# EAGLE board memory-smd (EAGLE 5.11)
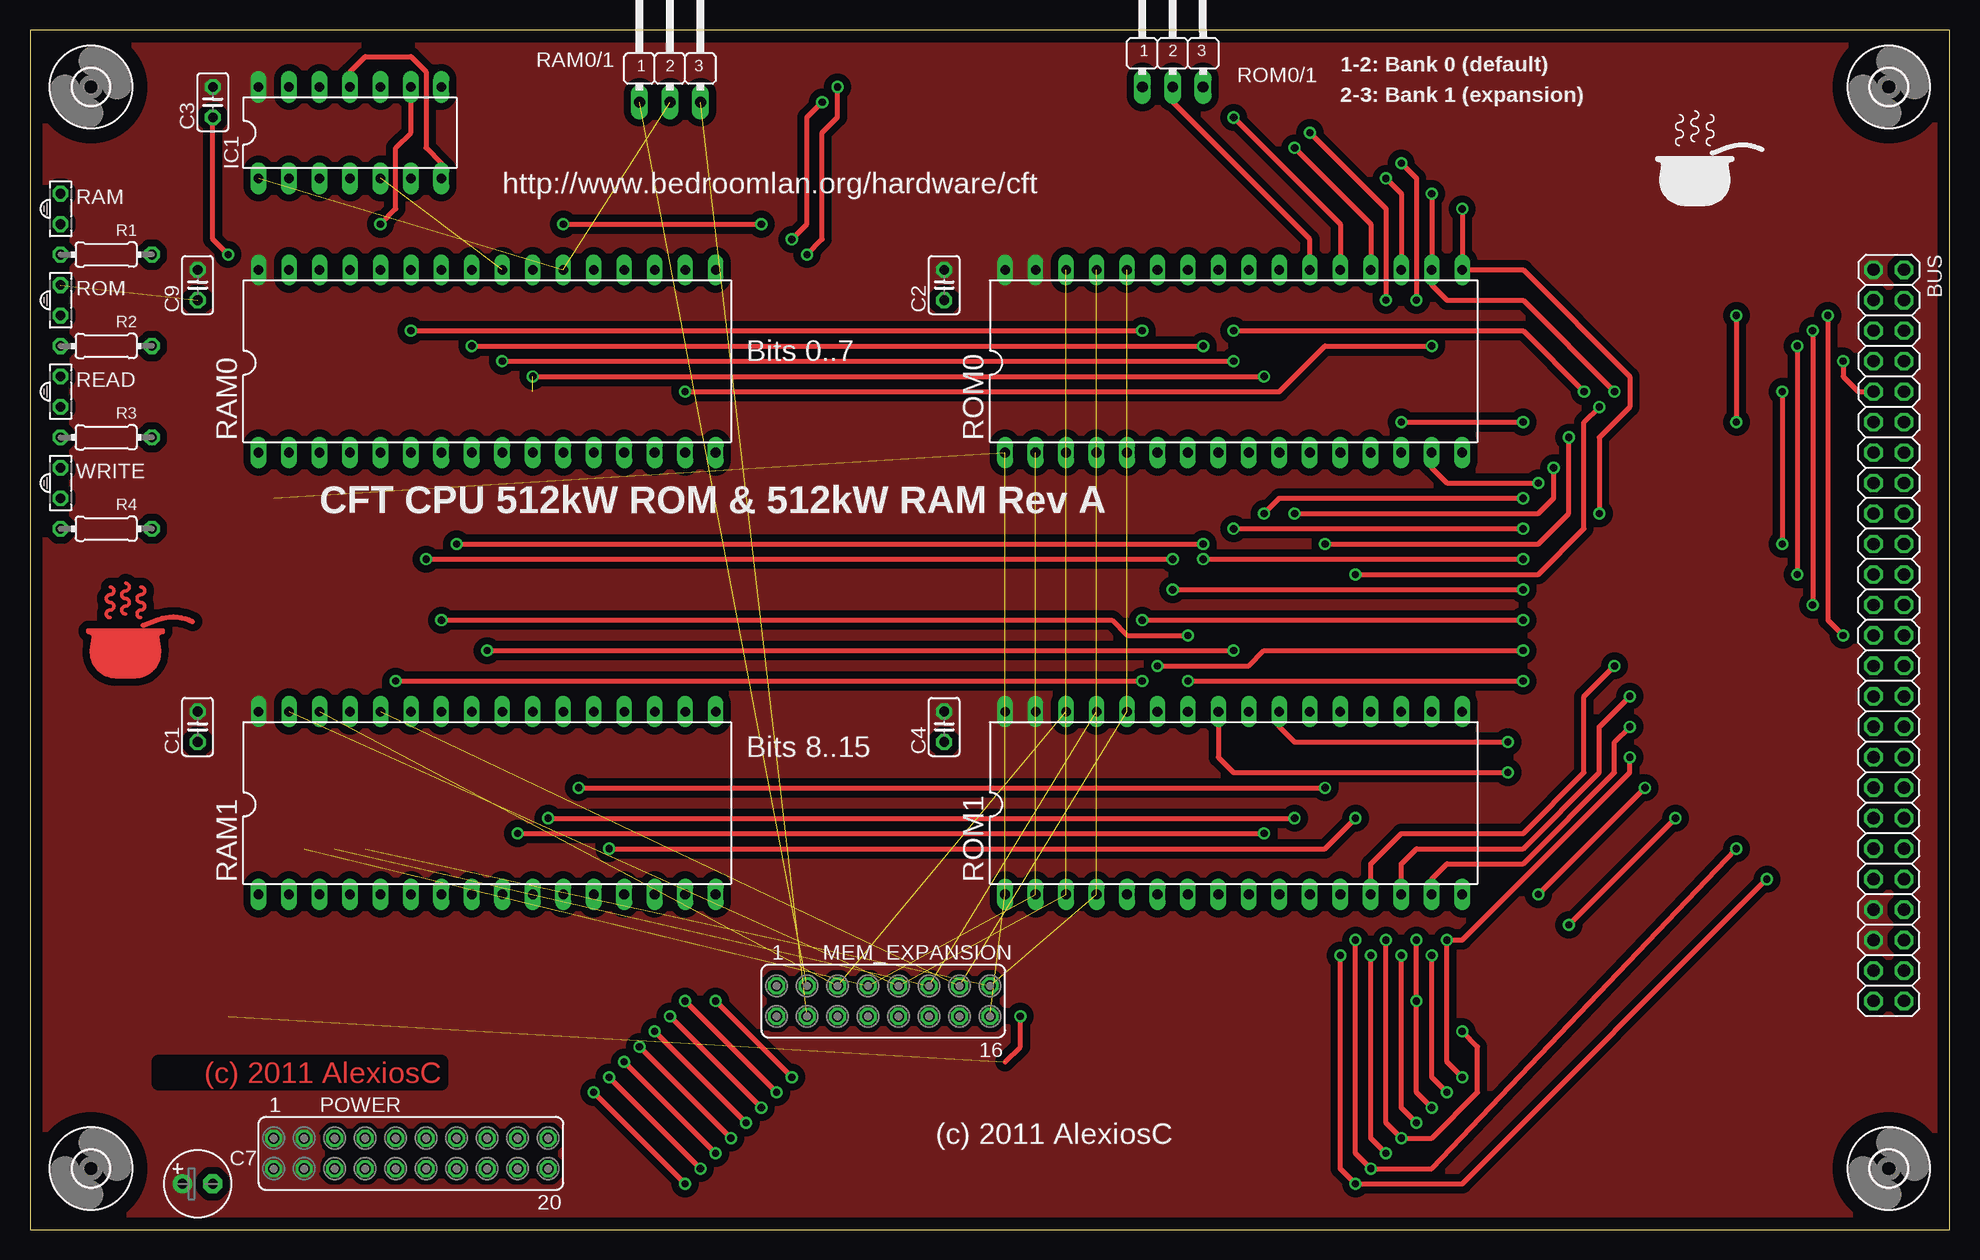
[diagram p0: board, top side]
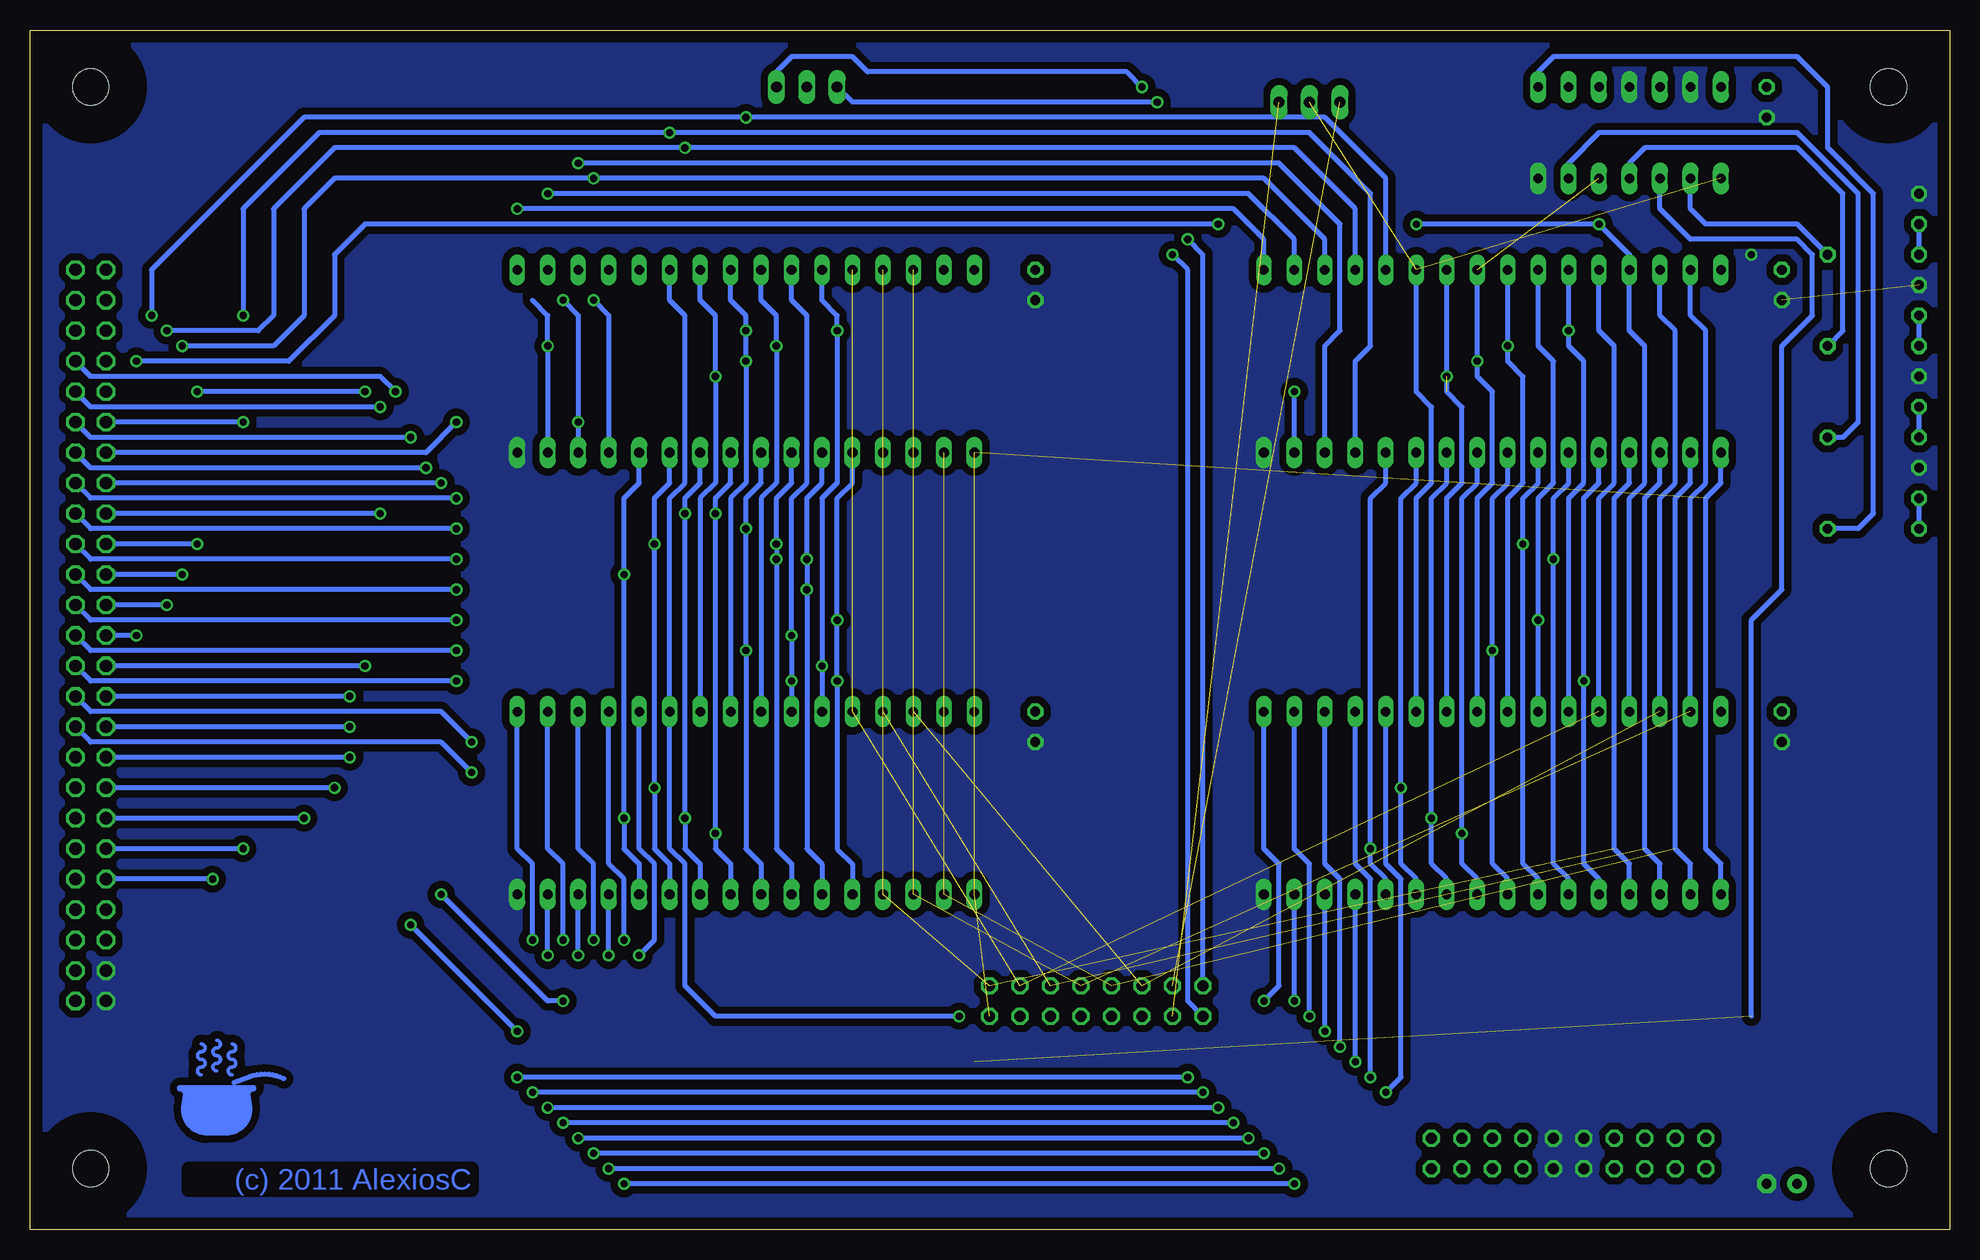
[diagram p1: board, bottom side, seen from below]

Size 160 x 100 mm. Coordinates in mm from the lower left corner, seen from the top.
Outline: 0,0 160,0 160,100 0,100 0,0
Copper layers (1*16): Top 0.035mm / dielectric 1.5mm / Bottom 0.035mm
Design rules "olimex-10mil": minimum track width 10mil, minimum drill 24mil, track to track 10mil, track to pad 10mil, pad to pad 10mil, via to via 10mil, smd to smd 10mil, copper to edge 40mil, drill to drill 10mil, minimum pad ring 10mil, minimum via ring 8mil, stop-mask expansion 0mil, vias tented up to drill 0mil, thermal gap 10mil
Net classes: 0 default: width 0.406 mm, clearance 0.305 mm; 1 Decoupling: width 1.27 mm

## Footprints (pad centres in the part's own frame; a part is rotated, then mirrored left to right if it is on the bottom)
2X25 = drill 1.016 octagon: 1 -30.48,-1.27; 2 -30.48,1.27; 3 -27.94,-1.27; 4 -27.94,1.27; 5 -25.4,-1.27; 6 -25.4,1.27; 7 -22.86,-1.27; 8 -22.86,1.27; 9 -20.32,-1.27; 10 -20.32,1.27; 11 -17.78,-1.27; 12 -17.78,1.27; 13 -15.24,-1.27; 14 -15.24,1.27; 15 -12.7,-1.27; 16 -12.7,1.27; 17 -10.16,-1.27; 18 -10.16,1.27; 19 -7.62,-1.27; 20 -7.62,1.27; 21 -5.08,-1.27; 22 -5.08,1.27; 23 -2.54,-1.27; 24 -2.54,1.27; 25 0,-1.27; 26 0,1.27; 27 2.54,-1.27; 28 2.54,1.27; 29 5.08,-1.27; 30 5.08,1.27; 31 7.62,-1.27; 32 7.62,1.27; 33 10.16,-1.27; 34 10.16,1.27; 35 12.7,-1.27; 36 12.7,1.27; 37 15.24,-1.27; 38 15.24,1.27; 39 17.78,-1.27; 40 17.78,1.27; 41 20.32,-1.27; 42 20.32,1.27; 43 22.86,-1.27; 44 22.86,1.27; 45 25.4,-1.27; 46 25.4,1.27; 47 27.94,-1.27; 48 27.94,1.27; 49 30.48,-1.27; 50 30.48,1.27
C025-025X050 = drill 0.813 octagon: 1 -1.27,0; 2 1.27,0
E2,5-6 = drill 0.813 pad 1.6 round: + -1.27,0 | drill 0.813 pad 1.6 octagon: - 1.27,0
3,0 = hole 3: 0,0
DIL14 = drill 0.813 long: 1 -7.62,-3.81; 2 -5.08,-3.81; 3 -2.54,-3.81; 4 0,-3.81; 5 2.54,-3.81; 6 5.08,-3.81; 7 7.62,-3.81; 8 7.62,3.81; 9 5.08,3.81; 10 2.54,3.81; 11 0,3.81; 12 -2.54,3.81; 13 -5.08,3.81; 14 -7.62,3.81
FE08-2 = drill 0.914 octagon: 1 -8.89,1.27; 2 -8.89,-1.27; 3 -6.35,1.27; 4 -6.35,-1.27; 5 -3.81,1.27; 6 -3.81,-1.27; 7 -1.27,1.27; 8 -1.27,-1.27; 9 1.27,1.27; 10 1.27,-1.27; 11 3.81,1.27; 12 3.81,-1.27; 13 6.35,1.27; 14 6.35,-1.27; 15 8.89,1.27; 16 8.89,-1.27
FE10-2 = drill 0.914 octagon: 1 -11.43,1.27; 2 -11.43,-1.27; 3 -8.89,1.27; 4 -8.89,-1.27; 5 -6.35,1.27; 6 -6.35,-1.27; 7 -3.81,1.27; 8 -3.81,-1.27; 9 -1.27,1.27; 10 -1.27,-1.27; 11 1.27,1.27; 12 1.27,-1.27; 13 3.81,1.27; 14 3.81,-1.27; 15 6.35,1.27; 16 6.35,-1.27; 17 8.89,1.27; 18 8.89,-1.27; 19 11.43,1.27; 20 11.43,-1.27
0204/7 = drill 0.813 octagon: 1 -3.81,0; 2 3.81,0
IRL80A = drill 0.813 octagon: A 0,-1.27; K 0,1.27
DIL32 = drill 0.813 long: 1 -19.05,-7.62; 2 -16.51,-7.62; 3 -13.97,-7.62; 4 -11.43,-7.62; 5 -8.89,-7.62; 6 -6.35,-7.62; 7 -3.81,-7.62; 8 -1.27,-7.62; 9 1.27,-7.62; 10 3.81,-7.62; 11 6.35,-7.62; 12 8.89,-7.62; 13 11.43,-7.62; 14 13.97,-7.62; 15 16.51,-7.62; 16 19.05,-7.62 | drill 0.8 long: 17 19.05,7.62; 18 16.51,7.62; 19 13.97,7.62; 20 11.43,7.62; 21 8.89,7.62; 22 6.35,7.62; 23 3.81,7.62; 24 1.27,7.62; 25 -1.27,7.62; 26 -3.81,7.62; 27 -6.35,7.62; 28 -8.89,7.62; 29 -11.43,7.62; 30 -13.97,7.62; 31 -16.51,7.62; 32 -19.05,7.62
JP2W = drill 0.914 long: 1 -2.54,-1.27; 2 0,-1.27; 3 2.54,-1.27

## Placement (x,y rotation side)
BUS  [2X25]  154.94,49.53 270 top
C1  1uF  [C025-025X050]  13.97,41.91 90 top
C2  1uF  [C025-025X050]  76.2,78.74 90 top
C3  0.1uF  [C025-025X050]  15.24,93.98 90 top
C4  1uF  [C025-025X050]  76.2,41.91 90 top
C7  100uF  [E2,5-6]  13.97,3.81 0 top
C9  1uF  [C025-025X050]  13.97,78.74 90 top
H1  MOUNT-HOLE3.0  [3,0]  154.94,95.25 0 top
H2  MOUNT-HOLE3.0  [3,0]  154.94,5.08 0 top
H3  MOUNT-HOLE3.0  [3,0]  5.08,5.08 0 top
H4  MOUNT-HOLE3.0  [3,0]  5.08,95.25 0 top
IC1  74HCT04N  [DIL14]  26.67,91.44 0 top
MEM_EXPANSION  [FE08-2]  71.12,19.05 0 top
POWER  [FE10-2]  31.75,6.35 0 top
R1  330  [0204/7]  6.35,81.28 180 top
R2  330  [0204/7]  6.35,73.66 180 top
R3  330  [0204/7]  6.35,66.04 180 top
R4  330  [0204/7]  6.35,58.42 180 top
RAM  [IRL80A]  2.54,85.09 0 top
RAM0  AS6C4008  [DIL32]  38.1,72.39 0 top
RAM0/1  [JP2W]  53.34,95.25 0 top
RAM1  AS6C4008  [DIL32]  38.1,35.56 0 top
READ  [IRL80A]  2.54,69.85 0 top
ROM  [IRL80A]  2.54,77.47 0 top
ROM0  29F040DIP32  [DIL32]  100.33,72.39 0 top
ROM0/1  [JP2W]  95.25,96.52 0 top
ROM1  29F040DIP32  [DIL32]  100.33,35.56 0 top
U$1  SIGNATUREPLANE  [SIGNATURE_PLANE]  5.08,45.72 0 top
U$2  SIGNATUREPLANE  [SIGNATURE_PLANE]  147.32,7.62 0 bottom
U$3  SIGNATURESILK  [SIGNATURE]  135.89,85.09 0 top
WRITE  [IRL80A]  2.54,62.23 0 top

## Library data of the parts
BUS = pinhead
C1-C4 C7 C9 R1-R4 = rcl
H1-H4 = holes
IC1 = 74xx-eu
MEM_EXPANSION POWER = con-lsta; OC_FARNELL: unknown; OC_NEWARK: unknown
RAM READ ROM WRITE = led
RAM0 RAM1 ROM0 ROM1 U$1-U$3 = alexios
RAM0/1 ROM0/1 = jumper

## Nets
-BANKEN: MEM_EXPANSION.12
-IO: BUS.7
-IRQ: BUS.5
-MEM: BUS.6
-R: BUS.8 IC1.5 RAM0.24 RAM1.24 ROM0.24 ROM1.24
-RAMEN: IC1.1 RAM0.22 RAM0/1.2 RAM1.22
-RAMEN0: MEM_EXPANSION.3 RAM0/1.1
-RAMEN1: MEM_EXPANSION.4 RAM0/1.3
-RESET: BUS.42
-ROMEN: IC1.3 ROM0.22 ROM0/1.2 ROM1.22
-ROMEN0: MEM_EXPANSION.1 ROM0/1.1
-ROMEN1: MEM_EXPANSION.2 ROM0/1.3
-W: BUS.9 IC1.9 RAM0.29 RAM1.29
ABUS0: BUS.10 RAM0.12 RAM1.12 ROM0.12 ROM1.12
ABUS1: BUS.12 RAM0.11 RAM1.11 ROM0.11 ROM1.11
ABUS2: BUS.14 RAM0.10 RAM1.10 ROM0.10 ROM1.10
ABUS3: BUS.16 RAM0.9 RAM1.9 ROM0.9 ROM1.9
ABUS4: BUS.18 RAM0.8 RAM1.8 ROM0.8 ROM1.8
ABUS5: BUS.20 RAM0.7 RAM1.7 ROM0.7 ROM1.7
ABUS6: BUS.22 RAM0.6 RAM1.6 ROM0.6 ROM1.6
ABUS7: BUS.24 RAM0.5 RAM1.5 ROM0.5 ROM1.5
ABUS8: BUS.26 RAM0.27 RAM1.27 ROM0.27 ROM1.27
ABUS9: BUS.28 RAM0.26 RAM1.26 ROM0.26 ROM1.26
ABUS10: BUS.30 RAM0.23 RAM1.23 ROM0.23 ROM1.23
ABUS11: BUS.32 RAM0.25 RAM1.25 ROM0.25 ROM1.25
ABUS12: BUS.34
ABUS13: BUS.36
ABUS14: BUS.38
ABUS15: BUS.40
AEXT0: MEM_EXPANSION.15 RAM0.4 RAM1.4 ROM0.4 ROM1.4
AEXT1: MEM_EXPANSION.13 RAM0.28 RAM1.28 ROM0.28 ROM1.28
AEXT2: MEM_EXPANSION.11 RAM0.3 RAM1.3 ROM0.29 ROM1.29
AEXT3: MEM_EXPANSION.9 RAM0.31 RAM1.31 ROM0.3 ROM1.3
AEXT4: MEM_EXPANSION.7 RAM0.2 RAM1.2 ROM0.2 ROM1.2
AEXT5: MEM_EXPANSION.5 RAM0.30 RAM1.30 ROM0.30 ROM1.30
AEXT6: MEM_EXPANSION.16 RAM0.1 RAM1.1 ROM0.1 ROM1.1
AEXT7: MEM_EXPANSION.14
CLOCK: BUS.3
CLOCK14: BUS.4
DBUS0: BUS.11 RAM0.13 ROM0.13
DBUS1: BUS.13 RAM0.14 ROM0.14
DBUS2: BUS.15 RAM0.15 ROM0.15
DBUS3: BUS.17 RAM0.17 ROM0.17
DBUS4: BUS.19 RAM0.18 ROM0.18
DBUS5: BUS.21 RAM0.19 ROM0.19
DBUS6: BUS.23 RAM0.20 ROM0.20
DBUS7: BUS.25 RAM0.21 ROM0.21
DBUS8: BUS.27 RAM1.13 ROM1.13
DBUS9: BUS.29 RAM1.14 ROM1.14
DBUS10: BUS.31 RAM1.15 ROM1.15
DBUS11: BUS.33 RAM1.17 ROM1.17
DBUS12: BUS.35 RAM1.18 ROM1.18
DBUS13: BUS.37 RAM1.19 ROM1.19
DBUS14: BUS.39 RAM1.20 ROM1.20
DBUS15: BUS.41 RAM1.21 ROM1.21
GND: BUS.47 BUS.49 C1.1 C2.1 C3.1 C4.1 C7.- C9.1 IC1.7 IC1.11 IC1.13 POWER.9 POWER.10 POWER.11 POWER.12 RAM0.16 RAM1.16 RAM.K READ.K ROM0.16 ROM1.16 ROM.K WRITE.K
N$1: R1.2 RAM.A
N$2: IC1.2 R1.1
N$3: R2.2 ROM.A
N$4: IC1.4 R2.1
N$5: R3.2 READ.A
N$6: IC1.6 R3.1
N$7: R4.2 WRITE.A
N$8: IC1.8 R4.1
VCC: BUS.1 BUS.43 BUS.45 C1.2 C2.2 C3.2 C4.2 C7.+ C9.2 IC1.14 POWER.1 POWER.2 POWER.3 POWER.4 RAM0.32 RAM1.32 ROM0.31 ROM0.32 ROM1.31 ROM1.32

## Tracks (layer width: path | path; a pad name or v marks a point on that pad's centre or on a via)
-R  (via drill 0.6)  (1 unrouted)
  Top 0.406: v100.33,74.93 124.46,74.93 v129.54,69.85 | v39.37,72.39 v100.33,72.39
  Bottom 0.406: RAM1.24 39.37,60.96 38.1,62.23 38.1,69.85 39.37,71.12 v39.37,72.39 RAM0.24 | BUS.8 154.94,71.12 130.81,71.12 v129.54,69.85 | v100.33,72.39 100.33,76.2 101.6,77.47 ROM0.24 | v100.33,72.39 v100.33,74.93 | v100.33,72.39 100.33,62.23 101.6,60.96 ROM1.24
-RAMEN  (2 unrouted)
  Bottom 0.406: RAM1.22 44.45,60.96 43.18,62.23 43.18,68.58 44.45,69.85 RAM0.22
-RAMEN0  (1 unrouted)
-RAMEN1  (1 unrouted)
-ROMEN  (via drill 0.6)  (1 unrouted)
  Top 0.406: 81.28,13.97 82.55,15.24 v82.55,17.78 | ROM0/1.2 95.25,93.98 106.68,82.55 ROM0.22
  Bottom 0.406: ROM0.22 106.68,77.47 105.41,76.2 105.41,62.23 106.68,60.96 ROM1.22 106.68,31.75 105.41,30.48 105.41,20.32 102.87,17.78 v82.55,17.78 | IC1.3 24.13,85.09 21.59,82.55 12.7,82.55 11.43,81.28 11.43,76.2 13.97,73.66 13.97,53.34 16.51,50.8 16.51,17.78
-ROMEN0  (via drill 0.6)
  Top 0.406: v63.5,82.55 64.77,83.82 64.77,92.71 v66.04,93.98
  Bottom 0.406: MEM_EXPANSION.1 62.23,81.28 v63.5,82.55 | v66.04,93.98 91.44,93.98 ROM0/1.1
-ROMEN1  (via drill 0.6)
  Top 0.406: v67.31,95.25 67.31,92.71 66.04,91.44 66.04,82.55 v64.77,81.28
  Bottom 0.406: ROM0/1.3 97.79,96.52 96.52,97.79 91.44,97.79 90.17,96.52 68.58,96.52 v67.31,95.25 | v64.77,81.28 63.5,80.01 63.5,19.05 MEM_EXPANSION.2
-W  (via drill 0.6)
  Top 0.406: v44.45,83.82 v60.96,83.82 | v151.13,72.39 151.13,71.12 152.4,69.85 BUS.9 | v29.21,83.82 30.48,85.09 30.48,90.17 31.75,91.44 IC1.9
  Bottom 0.406: RAM1.29 26.67,60.96 25.4,62.23 25.4,73.66 26.67,74.93 RAM0.29 26.67,81.28 v29.21,83.82 v44.45,83.82 | v151.13,72.39 138.43,72.39 134.62,76.2 134.62,81.28 132.08,83.82 v60.96,83.82
ABUS0  (via drill 0.6)
  Top 0.406: v130.81,68.58 129.54,67.31 129.54,58.42 125.73,54.61 v110.49,54.61 | v48.26,31.75 107.95,31.75 v110.49,34.29
  Bottom 0.406: RAM1.12 46.99,29.21 48.26,30.48 v48.26,31.75 48.26,60.96 46.99,62.23 RAM0.12 | ROM1.12 109.22,30.48 110.49,31.75 v110.49,34.29 v110.49,54.61 110.49,60.96 109.22,62.23 ROM0.12 | BUS.10 154.94,68.58 v130.81,68.58
ABUS1  (via drill 0.6)
  Top 0.406: v128.27,66.04 128.27,59.69 125.73,57.15 v107.95,57.15 | v45.72,36.83 v107.95,36.83
  Bottom 0.406: RAM1.11 44.45,29.21 45.72,30.48 v45.72,36.83 45.72,60.96 44.45,62.23 RAM0.11 | ROM1.11 106.68,30.48 107.95,31.75 v107.95,36.83 v107.95,57.15 107.95,60.96 106.68,62.23 ROM0.11 | BUS.12 154.94,66.04 v128.27,66.04
ABUS2  (via drill 0.6)
  Top 0.406: v127,63.5 127,60.96 125.73,59.69 v105.41,59.69 | v43.18,34.29 v105.41,34.29
  Bottom 0.406: RAM1.10 41.91,29.21 43.18,30.48 v43.18,34.29 43.18,60.96 41.91,62.23 RAM0.10 | ROM1.10 104.14,30.48 105.41,31.75 v105.41,34.29 v105.41,59.69 105.41,60.96 104.14,62.23 ROM0.10 | BUS.14 154.94,63.5 v127,63.5
ABUS3  (via drill 0.6)
  Top 0.406: v124.46,60.96 104.14,60.96 v102.87,59.69 | v40.64,33.02 v102.87,33.02
  Bottom 0.406: RAM1.9 39.37,29.21 40.64,30.48 v40.64,33.02 40.64,60.96 39.37,62.23 RAM0.9 | ROM1.9 101.6,30.48 102.87,31.75 v102.87,33.02 v102.87,59.69 102.87,60.96 101.6,62.23 ROM0.9 | BUS.16 154.94,60.96 v124.46,60.96
ABUS4  (via drill 0.6)
  Top 0.406: v100.33,58.42 v124.46,58.42 | v38.1,48.26 v100.33,48.26
  Bottom 0.406: RAM1.8 36.83,29.21 38.1,30.48 v38.1,48.26 38.1,60.96 36.83,62.23 RAM0.8 | ROM1.8 99.06,30.48 100.33,31.75 v100.33,48.26 v100.33,58.42 100.33,60.96 99.06,62.23 ROM0.8 | BUS.18 154.94,58.42 v124.46,58.42
ABUS5  (via drill 0.6)
  Top 0.406: v97.79,55.88 v124.46,55.88 | v35.56,57.15 v97.79,57.15
  Bottom 0.406: RAM1.7 34.29,29.21 35.56,30.48 v35.56,57.15 35.56,60.96 34.29,62.23 RAM0.7 | ROM1.7 96.52,30.48 97.79,31.75 v97.79,55.88 v97.79,57.15 97.79,60.96 96.52,62.23 ROM0.7 | BUS.20 154.94,55.88 v124.46,55.88
ABUS6  (via drill 0.6)
  Top 0.406: v95.25,53.34 v124.46,53.34 | v33.02,55.88 v95.25,55.88
  Bottom 0.406: RAM1.6 31.75,29.21 33.02,30.48 v33.02,55.88 33.02,60.96 31.75,62.23 RAM0.6 | ROM1.6 93.98,30.48 95.25,31.75 v95.25,53.34 v95.25,55.88 95.25,60.96 93.98,62.23 ROM0.6 | BUS.22 154.94,53.34 v124.46,53.34
ABUS7  (via drill 0.6)
  Top 0.406: v92.71,50.8 v124.46,50.8 | v30.48,45.72 v92.71,45.72
  Bottom 0.406: RAM1.5 29.21,29.21 30.48,30.48 v30.48,45.72 30.48,60.96 29.21,62.23 RAM0.5 | ROM1.5 91.44,30.48 92.71,31.75 v92.71,45.72 v92.71,50.8 92.71,60.96 91.44,62.23 ROM0.5 | BUS.24 154.94,50.8 v124.46,50.8
ABUS8  (via drill 0.6)
  Top 0.406: v93.98,46.99 101.6,46.99 102.87,48.26 v124.46,48.26 | v31.75,74.93 v92.71,74.93
  Bottom 0.406: RAM1.27 31.75,60.96 30.48,62.23 30.48,72.39 31.75,73.66 v31.75,74.93 RAM0.27 | ROM1.27 v93.98,46.99 93.98,60.96 92.71,62.23 v92.71,74.93 92.71,76.2 93.98,77.47 ROM0.27 | BUS.26 154.94,48.26 v124.46,48.26
ABUS9  (via drill 0.6)
  Top 0.406: v96.52,45.72 v124.46,45.72 | v34.29,50.8 90.17,50.8 91.44,49.53 v96.52,49.53
  Bottom 0.406: RAM1.26 v34.29,50.8 34.29,60.96 33.02,62.23 33.02,72.39 34.29,73.66 RAM0.26 | ROM0.26 96.52,77.47 95.25,76.2 95.25,62.23 96.52,60.96 v96.52,49.53 v96.52,45.72 ROM1.26 | BUS.28 154.94,45.72 v124.46,45.72
ABUS10  (via drill 0.6)  (1 unrouted)
  Top 0.406: v123.19,40.64 105.41,40.64 104.14,41.91 ROM1.23 | v41.91,71.12 v102.87,71.12
  Bottom 0.406: RAM1.23 41.91,60.96 40.64,62.23 40.64,68.58 41.91,69.85 RAM0.23 | ROM0.23 104.14,77.47 102.87,76.2 v102.87,71.12 102.87,62.23 104.14,60.96 ROM1.23 | BUS.30 154.94,43.18 125.73,43.18 v123.19,40.64
ABUS11  (via drill 0.6)
  Top 0.406: v123.19,38.1 100.33,38.1 99.06,39.37 ROM1.25 | v36.83,73.66 v97.79,73.66
  Bottom 0.406: RAM1.25 36.83,60.96 35.56,62.23 35.56,71.12 36.83,72.39 v36.83,73.66 RAM0.25 | ROM1.25 99.06,60.96 97.79,62.23 v97.79,73.66 97.79,76.2 99.06,77.47 ROM0.25 | BUS.32 154.94,40.64 125.73,40.64 v123.19,38.1
AEXT0  (3 unrouted)
  Bottom 0.406: RAM0.4 26.67,62.23 27.94,60.96 27.94,31.75 26.67,30.48 RAM1.4
AEXT1  (3 unrouted)
  Bottom 0.406: RAM0.28 29.21,74.93 27.94,73.66 27.94,62.23 29.21,60.96 RAM1.28
AEXT2  (3 unrouted)
  Bottom 0.406: RAM1.3 24.13,30.48 25.4,31.75 25.4,60.96 24.13,62.23 RAM0.3
AEXT3  (3 unrouted)
  Bottom 0.406: RAM1.31 21.59,60.96 20.32,62.23 20.32,74.93 21.59,76.2 RAM0.31
AEXT4  (3 unrouted)
  Bottom 0.406: RAM1.2 21.59,30.48 22.86,31.75 22.86,60.96 21.59,62.23 RAM0.2
AEXT5  (3 unrouted)
  Bottom 0.406: RAM0.30 24.13,76.2 22.86,74.93 22.86,62.23 24.13,60.96 RAM1.30
AEXT6  (3 unrouted)
  Bottom 0.406: RAM1.1 19.05,30.48 20.32,31.75 20.32,60.96 19.05,62.23 RAM0.1
DBUS0  (via drill 0.6)
  Top 0.406: v106.68,91.44 113.03,85.09 v113.03,77.47 | v142.24,76.2 v142.24,67.31
  Bottom 0.406: RAM0.13 49.53,72.39 48.26,73.66 48.26,86.36 53.34,91.44 v106.68,91.44 135.89,91.44 142.24,85.09 v142.24,76.2 | v113.03,77.47 111.76,76.2 ROM0.13 | v142.24,67.31 BUS.11
DBUS1  (via drill 0.6)
  Top 0.406: v114.3,88.9 115.57,87.63 v115.57,77.47 | v114.3,67.31 v124.46,67.31
  Bottom 0.406: RAM0.14 52.07,73.66 50.8,74.93 50.8,83.82 55.88,88.9 v114.3,88.9 | ROM0.14 v114.3,67.31 114.3,76.2 v115.57,77.47 | BUS.13 127,64.77 v124.46,67.31
DBUS2  (via drill 0.6)
  Top 0.406: v125.73,62.23 118.11,62.23 116.84,63.5 ROM0.15 | v116.84,73.66 107.95,73.66 104.14,69.85 v54.61,69.85
  Bottom 0.406: RAM0.15 v54.61,69.85 | 118.11,77.47 116.84,76.2 v116.84,73.66 ROM0.15 | v125.73,62.23 BUS.15
DBUS3  (via drill 0.6)
  Top 0.406: v119.38,85.09 ROM0.17 124.46,80.01 133.35,71.12 133.35,68.58 130.81,66.04 v130.81,59.69
  Bottom 0.406: RAM0.17 57.15,82.55 59.69,85.09 v119.38,85.09 | v130.81,59.69 BUS.17
DBUS4  (via drill 0.6)
  Top 0.406: v116.84,86.36 ROM0.18 116.84,78.74 118.11,77.47 124.46,77.47 v132.08,69.85 | v146.05,69.85 v146.05,57.15
  Bottom 0.406: RAM0.18 54.61,82.55 58.42,86.36 v116.84,86.36 | v132.08,69.85 v146.05,69.85 | v146.05,57.15 BUS.19
DBUS5  (via drill 0.6)
  Top 0.406: v113.03,87.63 114.3,86.36 ROM0.19 | v147.32,73.66 v147.32,54.61
  Bottom 0.406: RAM0.19 52.07,82.55 57.15,87.63 v113.03,87.63 134.62,87.63 137.16,85.09 137.16,76.2 139.7,73.66 v147.32,73.66 | v147.32,54.61 BUS.21
DBUS6  (via drill 0.6)
  Top 0.406: v105.41,90.17 111.76,83.82 ROM0.20 | v148.59,74.93 v148.59,52.07
  Bottom 0.406: RAM0.20 49.53,85.09 54.61,90.17 v105.41,90.17 134.62,90.17 139.7,85.09 139.7,76.2 140.97,74.93 v148.59,74.93 | v148.59,52.07 BUS.23
DBUS7  (via drill 0.6)
  Top 0.406: v100.33,92.71 109.22,83.82 ROM0.21 | v149.86,76.2 149.86,50.8 v151.13,49.53
  Bottom 0.406: RAM0.21 46.99,87.63 52.07,92.71 v100.33,92.71 137.16,92.71 149.86,80.01 v149.86,76.2 | v151.13,49.53 BUS.25
DBUS8  (via drill 0.6)
  Top 0.406: v113.03,6.35 111.76,7.62 v111.76,22.86 | v132.08,46.99 129.54,44.45 129.54,38.1 124.46,33.02 114.3,33.02 111.76,30.48 ROM1.13 | v57.15,6.35 v49.53,13.97
  Bottom 0.406: v49.53,13.97 RAM1.13 | v57.15,6.35 v113.03,6.35 | v111.76,22.86 ROM1.13 | v132.08,46.99 BUS.27
DBUS9  (via drill 0.6)
  Top 0.406: v115.57,8.89 114.3,10.16 v114.3,22.86 | v133.35,44.45 130.81,41.91 130.81,38.1 124.46,31.75 115.57,31.75 114.3,30.48 ROM1.14 | v59.69,8.89 v52.07,16.51
  Bottom 0.406: v52.07,16.51 RAM1.14 | v59.69,8.89 v115.57,8.89 | v114.3,22.86 ROM1.14 | v133.35,44.45 BUS.29
DBUS10  (via drill 0.6)
  Top 0.406: v133.35,41.91 132.08,40.64 132.08,38.1 124.46,30.48 118.11,30.48 116.84,29.21 ROM1.15 | v118.11,11.43 116.84,12.7 v116.84,22.86 | v62.23,11.43 v54.61,19.05
  Bottom 0.406: v133.35,41.91 BUS.31 | v54.61,19.05 RAM1.15 | v62.23,11.43 v118.11,11.43 | v116.84,22.86 ROM1.15
DBUS11  (via drill 0.6)
  Top 0.406: v119.38,12.7 118.11,13.97 v118.11,24.13 119.38,24.13 133.35,38.1 v133.35,39.37 | v57.15,19.05 v63.5,12.7
  Bottom 0.406: RAM1.17 57.15,31.75 55.88,30.48 55.88,20.32 v57.15,19.05 | v63.5,12.7 v119.38,12.7 | ROM1.17 119.38,31.75 118.11,30.48 v118.11,24.13 | v133.35,39.37 BUS.33
DBUS12  (via drill 0.6)
  Top 0.406: v116.84,10.16 115.57,11.43 v115.57,19.05 v115.57,24.13 | v125.73,27.94 v134.62,36.83 | v60.96,10.16 v53.34,17.78
  Bottom 0.406: RAM1.18 54.61,31.75 53.34,30.48 v53.34,17.78 | v60.96,10.16 v116.84,10.16 | ROM1.18 116.84,31.75 115.57,30.48 v115.57,24.13 | v134.62,36.83 BUS.35 | v125.73,27.94 116.84,19.05 v115.57,19.05
DBUS13  (via drill 0.6)
  Top 0.406: v113.03,24.13 113.03,8.89 v114.3,7.62 116.84,7.62 120.65,11.43 120.65,15.24 v119.38,16.51 | v128.27,25.4 v137.16,34.29 | v58.42,7.62 v50.8,15.24
  Bottom 0.406: RAM1.19 52.07,30.48 50.8,29.21 v50.8,15.24 | v58.42,7.62 v114.3,7.62 | ROM1.19 114.3,31.75 113.03,30.48 v113.03,24.13 | v137.16,34.29 BUS.37 | v119.38,16.51 v128.27,25.4
DBUS14  (via drill 0.6)
  Top 0.406: v110.49,24.13 110.49,6.35 v111.76,5.08 116.84,5.08 v142.24,31.75 | v55.88,5.08 v48.26,12.7
  Bottom 0.406: RAM1.20 49.53,30.48 48.26,29.21 v48.26,12.7 | v55.88,5.08 v111.76,5.08 | ROM1.20 111.76,30.48 110.49,29.21 v110.49,24.13 | v142.24,31.75 BUS.39
DBUS15  (via drill 0.6)
  Top 0.406: v109.22,22.86 109.22,5.08 v110.49,3.81 119.38,3.81 v144.78,29.21 | v54.61,3.81 v46.99,11.43
  Bottom 0.406: RAM1.21 46.99,30.48 45.72,29.21 45.72,12.7 v46.99,11.43 | v54.61,3.81 v110.49,3.81 | ROM1.21 109.22,31.75 107.95,30.48 107.95,24.13 v109.22,22.86 | v144.78,29.21 BUS.41
GND  (via drill 0.6)  (1 unrouted)
  Top 0.406: IC1.11 26.67,96.52 27.94,97.79 31.75,97.79 33.02,96.52 33.02,90.17 34.29,88.9 IC1.7 | C3.1 15.24,82.55 v16.51,81.28
  pour Bottom (isolate 0.508, no thermals): 30.48,8.89 29.21,7.62 29.21,5.08 30.48,3.81 33.02,3.81 34.29,5.08 34.29,7.62 33.02,8.89
  pour Bottom (isolate 0.61, no thermals): 0,100.33 0,0 160.02,0 160.02,100.33
N$1
  Bottom 0.406: R1.2 RAM.A
N$2
  Bottom 0.406: R1.1 12.7,83.82 20.32,83.82 21.59,85.09 IC1.2
N$3
  Bottom 0.406: R2.2 ROM.A
N$4
  Bottom 0.406: R2.1 8.89,74.93 8.89,86.36 12.7,90.17 25.4,90.17 26.67,88.9 IC1.4
N$5
  Bottom 0.406: R3.2 READ.A
N$6
  Bottom 0.406: R3.1 8.89,66.04 7.62,67.31 7.62,86.36 12.7,91.44 29.21,91.44 31.75,88.9 IC1.6
N$7
  Bottom 0.406: R4.2 WRITE.A
N$8
  Bottom 0.406: R4.1 7.62,58.42 6.35,59.69 6.35,86.36 10.16,90.17 10.16,95.25 12.7,97.79 33.02,97.79 34.29,96.52 IC1.8
VCC
  pour Top (isolate 0.508, no thermals): 20.32,8.89 19.05,7.62 19.05,5.08 20.32,3.81 22.86,3.81 24.13,5.08 24.13,7.62 22.86,8.89
  pour Top (isolate 0.61, rank 6, no thermals): 0,100.33 0,0 160.02,0 160.02,100.33

## Text on the board
Top: (c) 2011 AlexiosC
Bottom: (c) 2011 AlexiosC
tNames: 1-2: Bank 0 (default) | 2-3: Bank 1 (expansion) | http://www.bedroomlan.org/hardware/cft | Bits 0..7 | CFT CPU 512kW ROM & 512kW RAM Rev A | Bits 8..15 | (c) 2011 AlexiosC